# EAGLE board Project_02(Pokey Clicker) (EAGLE 9.6.2)
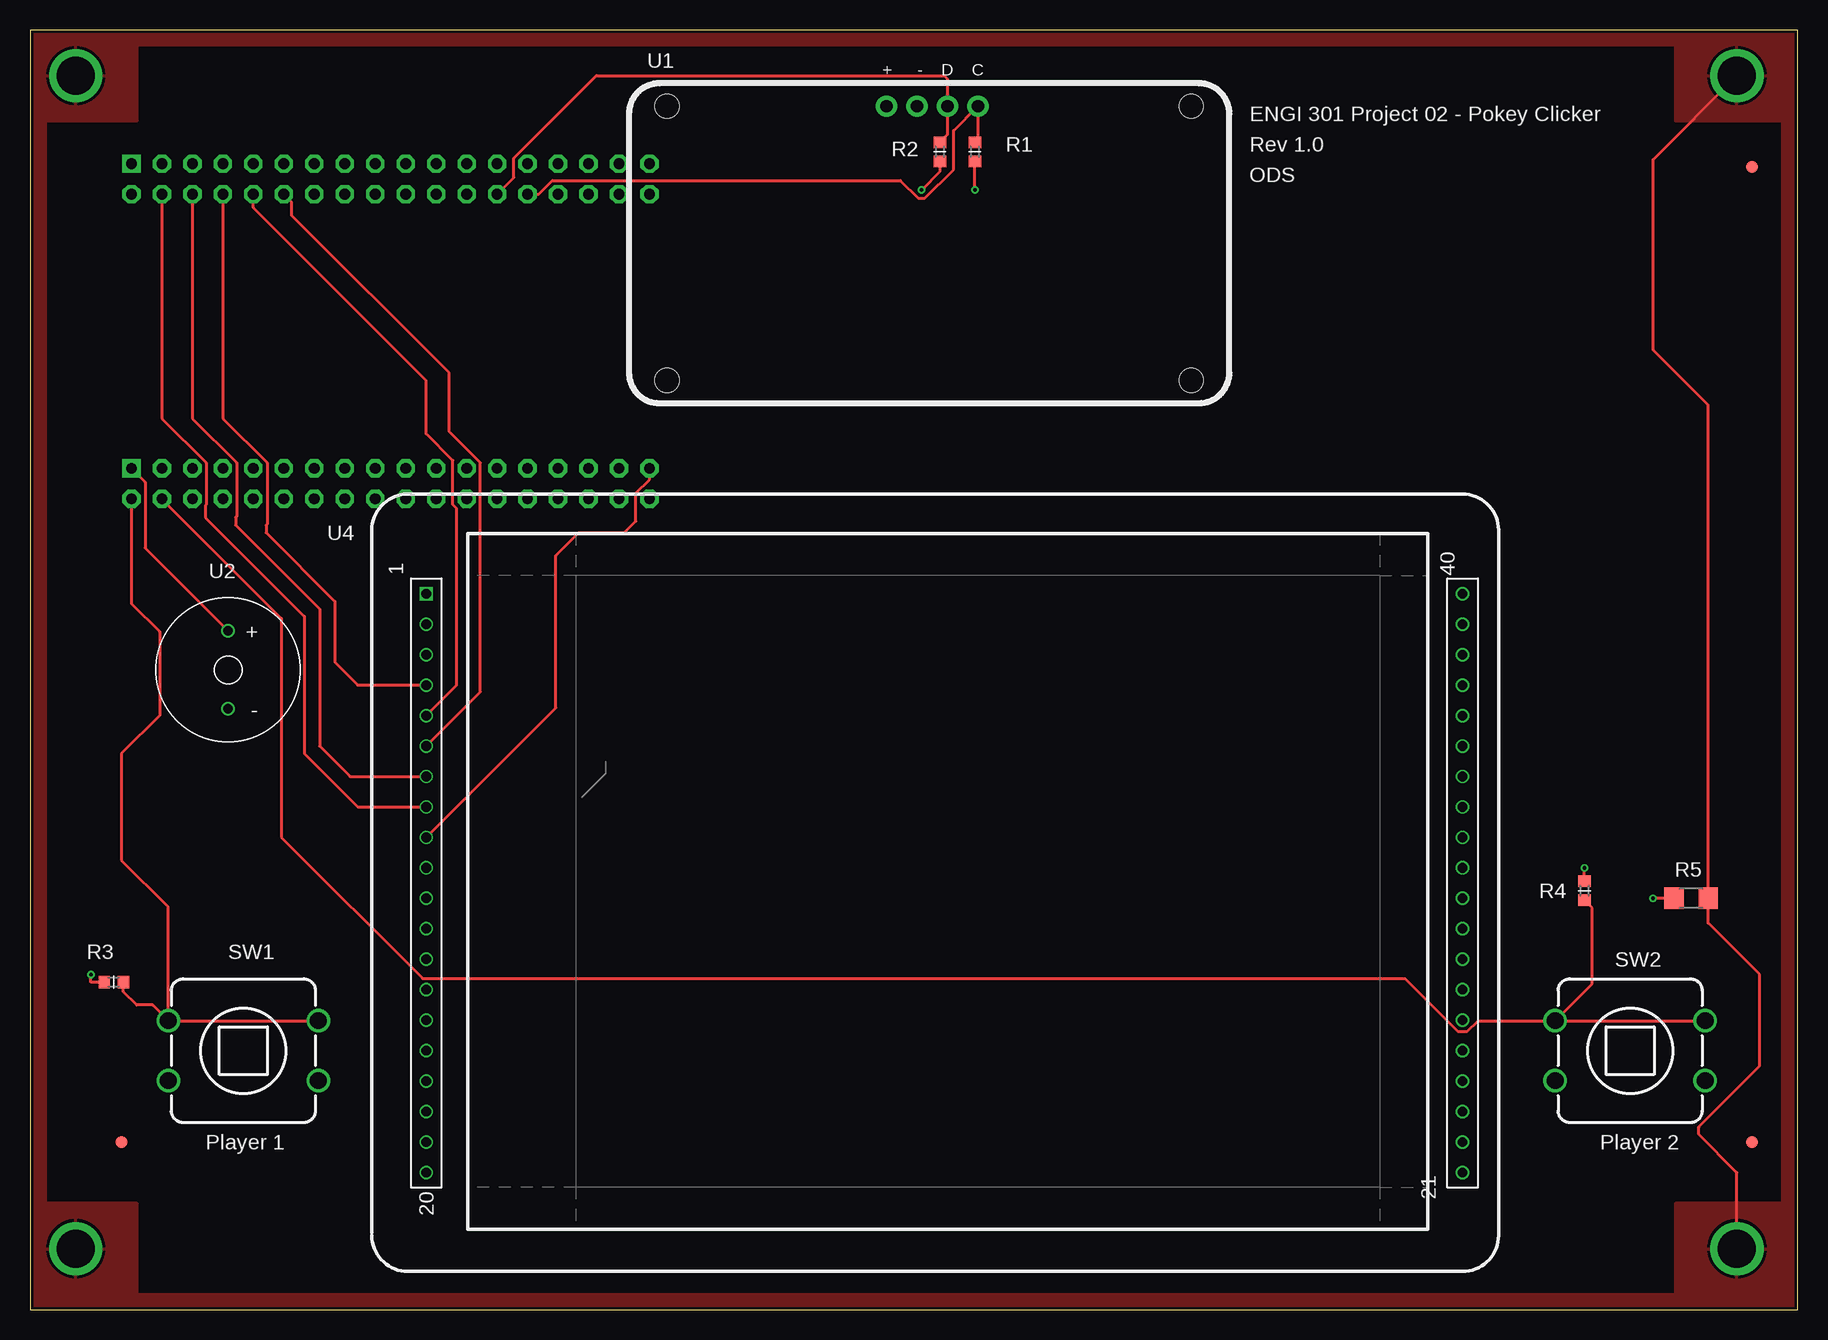
[diagram p0: board, top side]
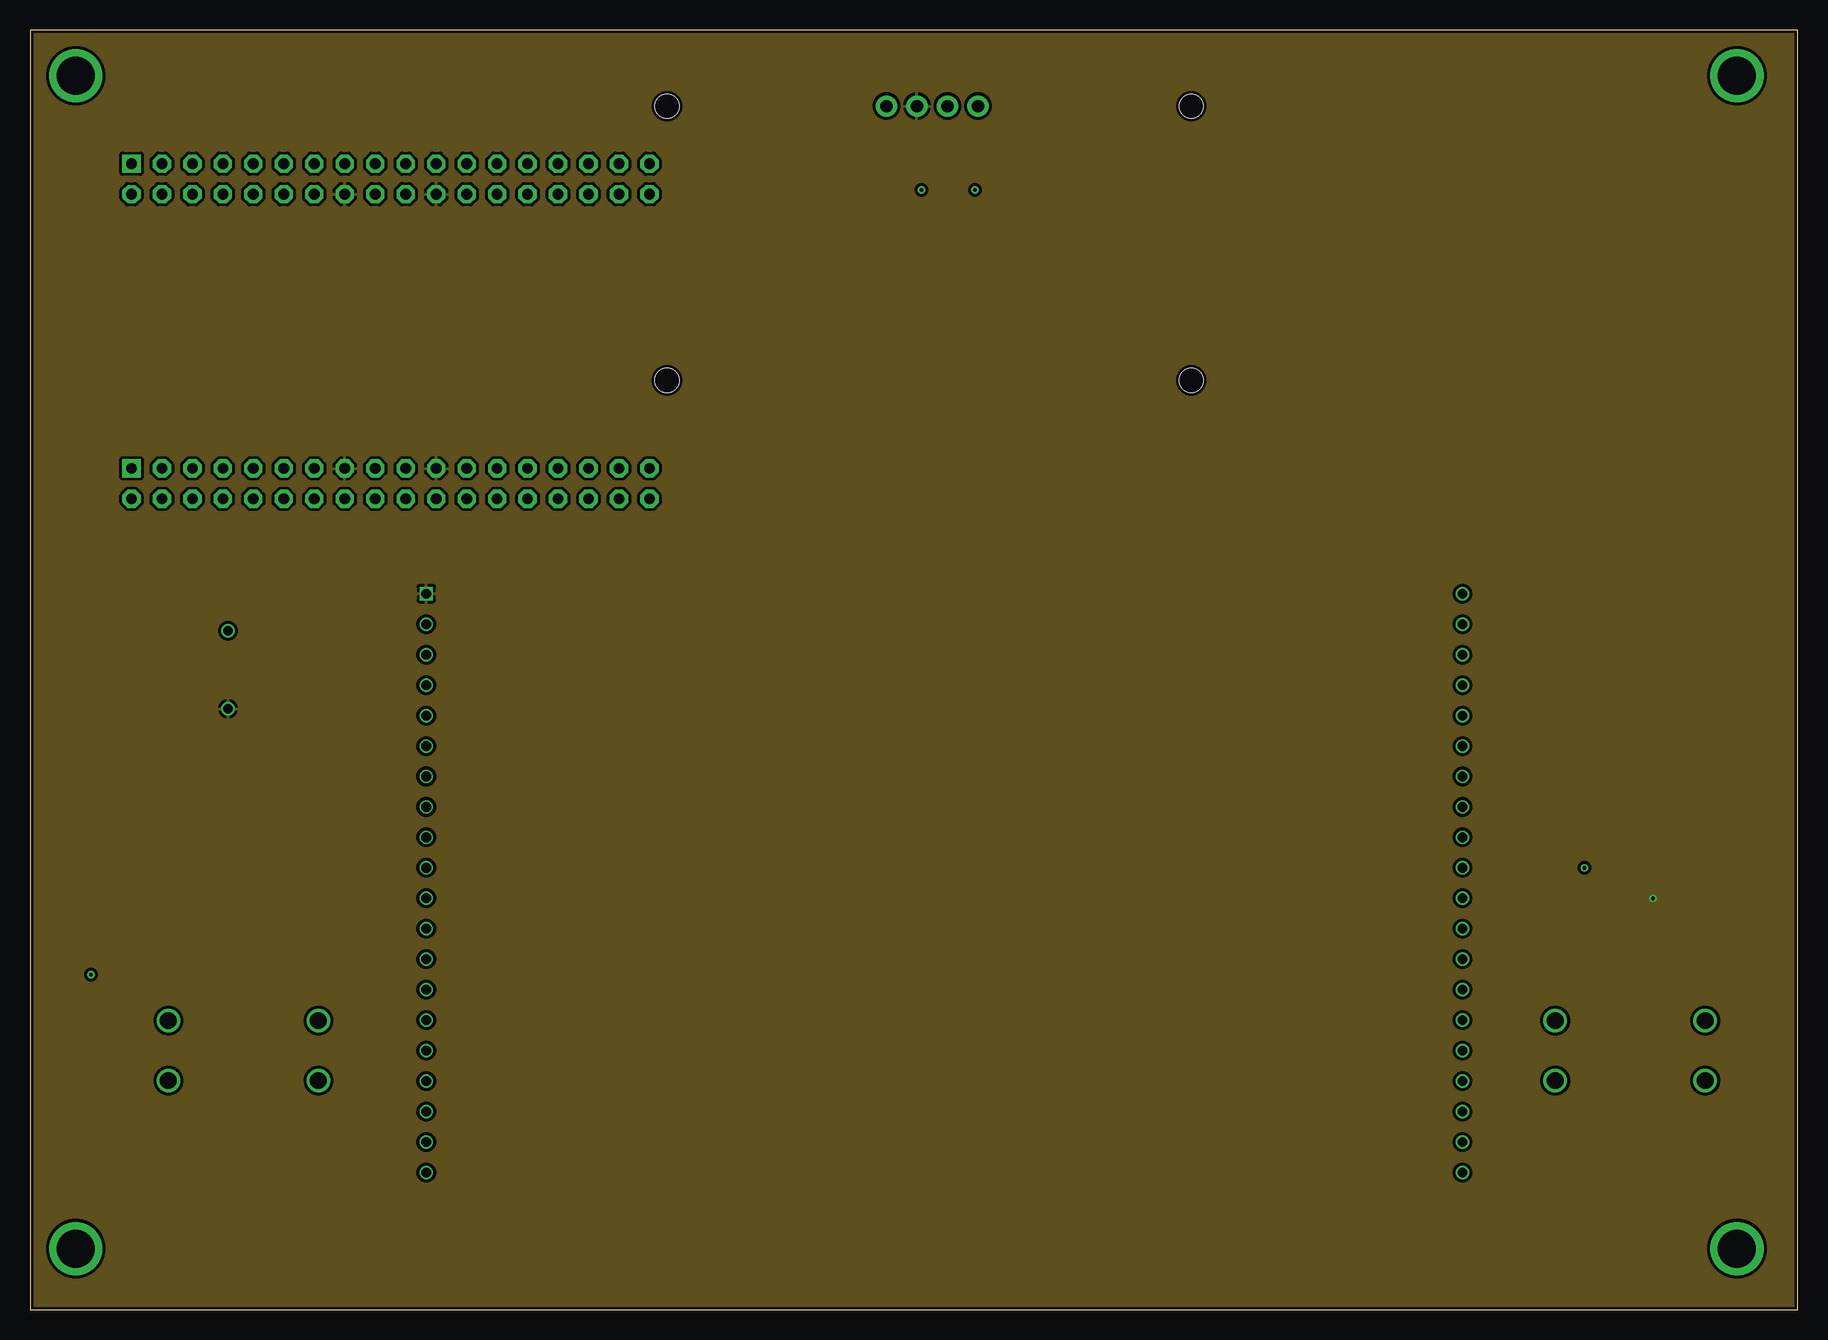
[diagram p1: board, inner layer Route2]
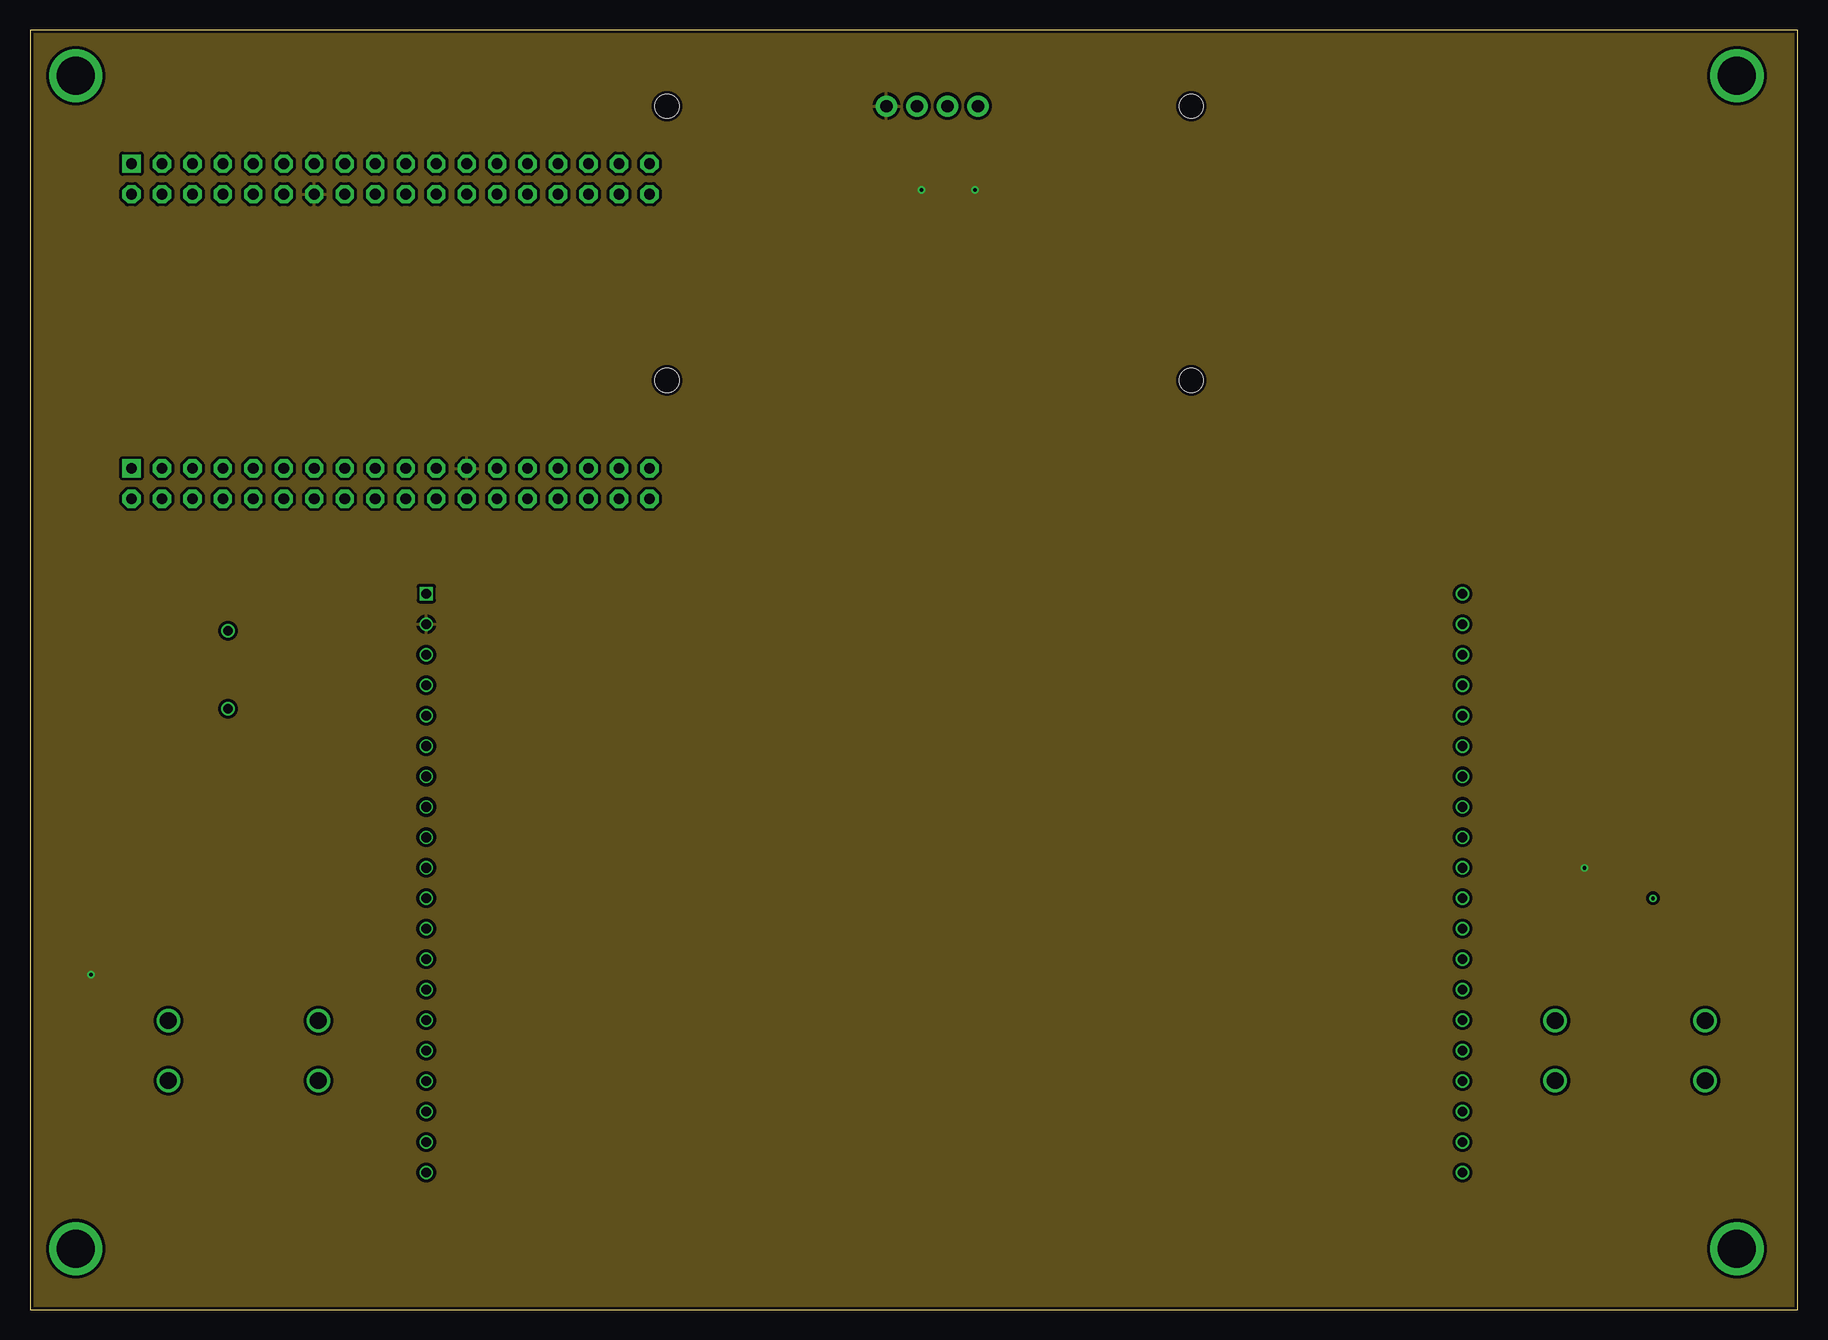
[diagram p2: board, inner layer Route15]
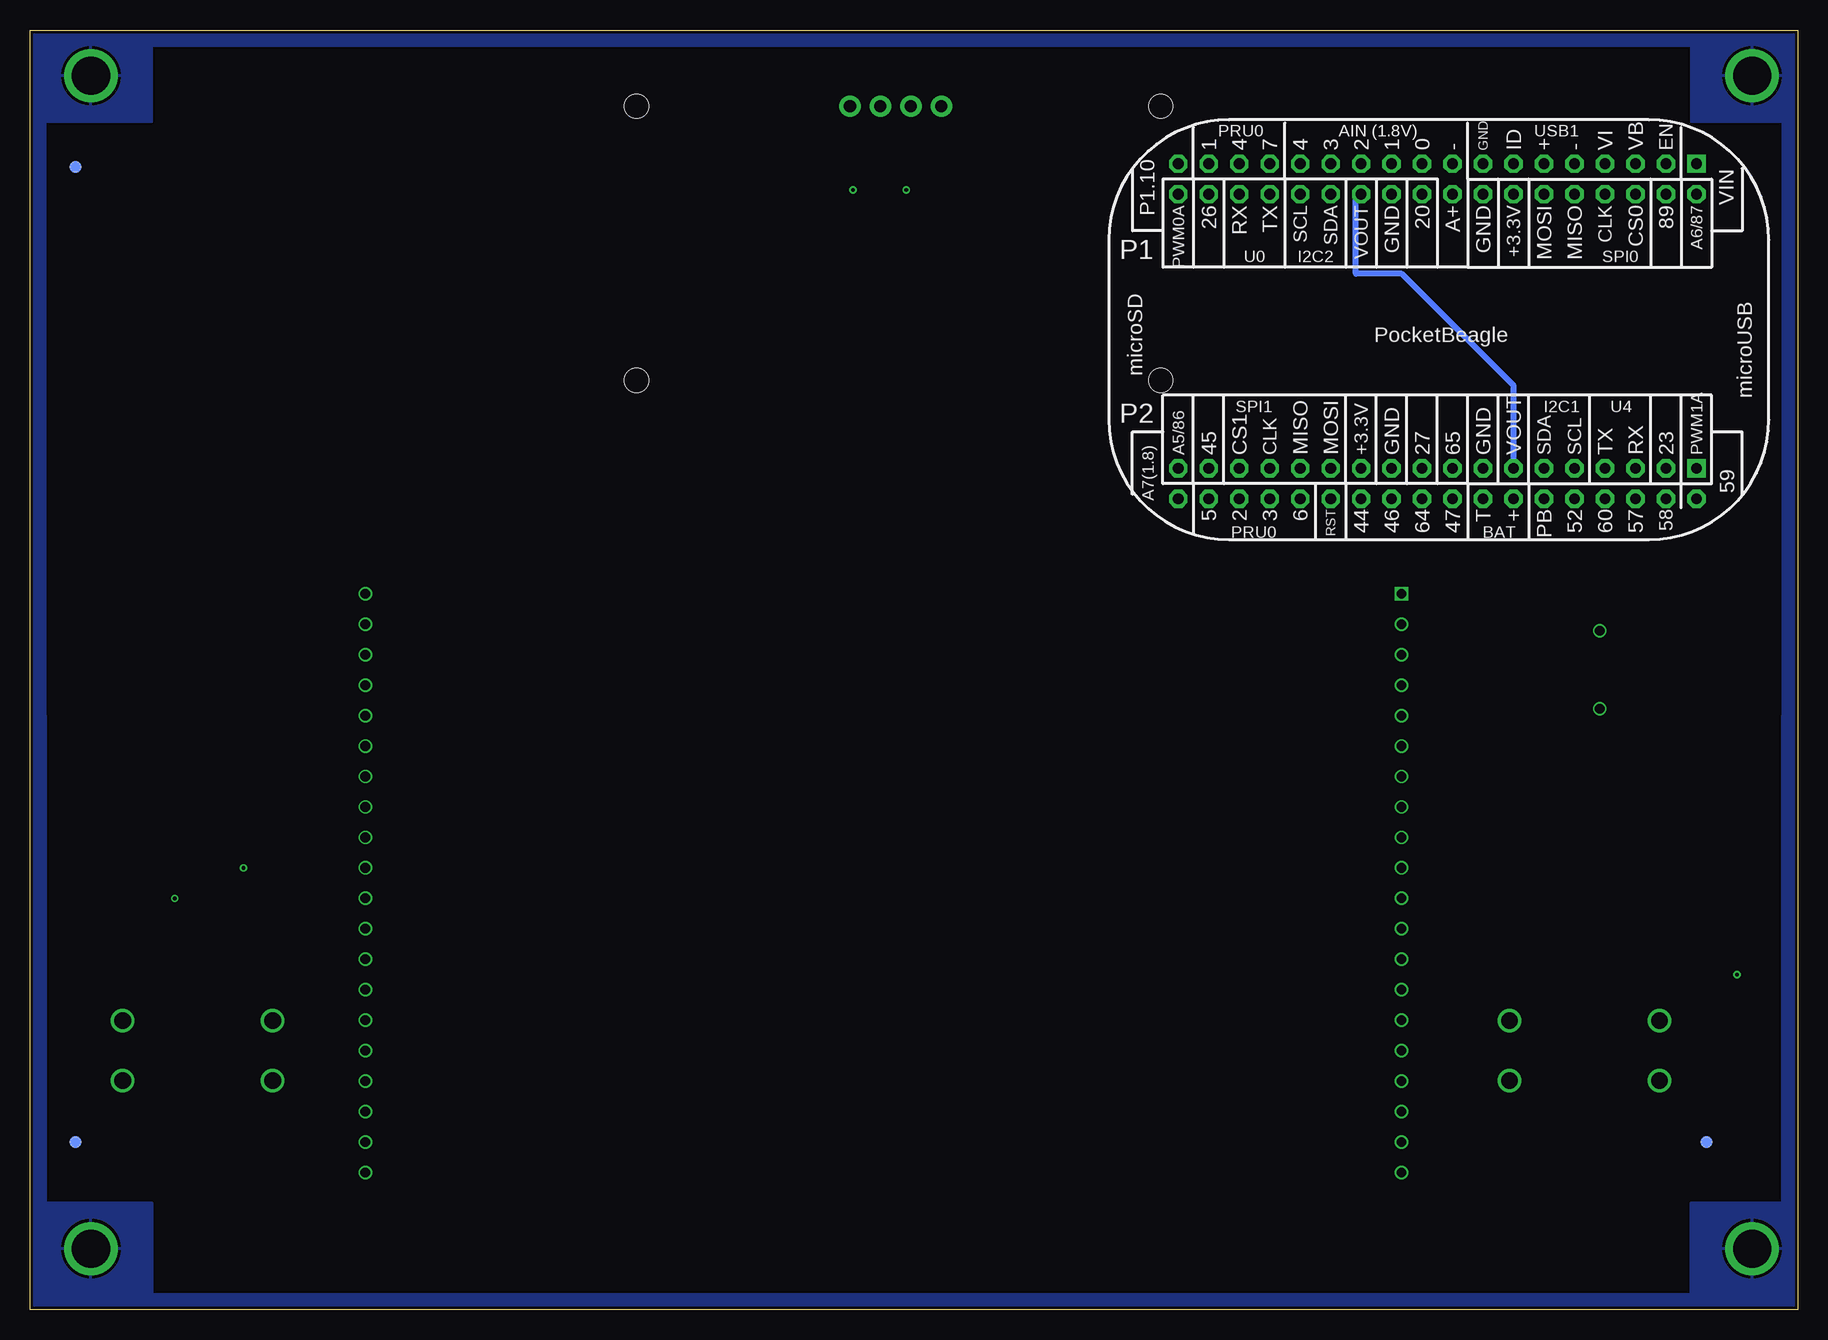
[diagram p3: board, bottom side, seen from below]

Size 147.32 x 106.68 mm. Coordinates in mm from the lower left corner, seen from the top.
Outline: 0,0 147.32,0 147.32,106.68 0,106.68 0,0
Copper layers (1*2*15*16): Top 0.035mm / dielectric 0.23mm / Route2 0.035mm / dielectric 0.93mm / Route15 0.035mm / dielectric 0.23mm / Bottom 0.035mm
Design rules "ENGI301_4lyr": minimum track width 10mil, minimum drill 12mil, track to track 10mil, track to pad 10mil, pad to pad 10mil, via to via 10mil, smd to smd 10mil, copper to edge 10mil, drill to drill 12mil, minimum pad ring 6mil, minimum via ring 6mil, stop-mask expansion 3mil, vias tented up to drill 25mil, thermal gap 10mil

## Footprints (pad centres in the part's own frame; a part is rotated, then mirrored left to right if it is on the bottom)
FIDUCIAL_40MIL = smd 1.016 x 1.016: P$1 0,0
MOUNTING_HOLE = drill 3.175 pad 4.445: P$1 0,0
R0603 = smd 0.95 x 1.031: 1 -0.8,0; 2 0.8,0
R1206 = smd 1.6 x 1.803: 1 -1.422,0; 2 1.422,0
BUTTON_12.5MM = drill 1.4: 1 -6.25,2.5; 2 -6.25,-2.5; 3 6.25,2.5; 4 6.25,-2.5
0.56_HEX_BACKPACK = drill 1.016 pad 1.778: GND -1.016,11.43; SCL 4.064,11.43; SDA 1.524,11.43; VCC -3.556,11.43 | hole 2: -21.844,-11.43; 21.844,-11.43; -21.844,11.43; 21.844,11.43
BUZZER_6.5MM = drill 0.8: + 0,-3.25; - 0,3.25
POCKETBEAGLE = drill 0.889 pad 1.524 square: P1_01 5.91,3.53; P2_01 5.91,28.93 | drill 0.889 pad 1.524 octagon: P1_02 5.91,6.07; P1_03 8.45,3.53; P1_04 8.45,6.07; P1_05 10.99,3.53; P1_06 10.99,6.07; P1_07 13.53,3.53; P1_08 13.53,6.07; P1_09 16.07,3.53; P1_10 16.07,6.07; P1_11 18.61,3.53; P1_12 18.61,6.07; P1_13 21.15,3.53; P1_14 21.15,6.07; P1_15 23.69,3.53; P1_16 23.69,6.07; P1_17 26.23,3.53; P1_18 26.23,6.07; P1_19 28.77,3.53; P1_20 28.77,6.07; P1_21 31.31,3.53; P1_22 31.31,6.07; P1_23 33.85,3.53; P1_24 33.85,6.07; P1_25 36.39,3.53; P1_26 36.39,6.07; P1_27 38.93,3.53; P1_28 38.93,6.07; P1_29 41.47,3.53; P1_30 41.47,6.07; P1_31 44.01,3.53; P1_32 44.01,6.07; P1_33 46.55,3.53; P1_34 46.55,6.07; P1_35 49.09,3.53; P1_36 49.09,6.07; P2_02 5.91,31.47; P2_03 8.45,28.93; P2_04 8.45,31.47; P2_05 10.99,28.93; P2_06 10.99,31.47; P2_07 13.53,28.93; P2_08 13.53,31.47; P2_09 16.07,28.93; P2_10 16.07,31.47; P2_11 18.61,28.93; P2_12 18.61,31.47; P2_13 21.15,28.93; P2_14 21.15,31.47; P2_15 23.69,28.93; P2_16 23.69,31.47; P2_17 26.23,28.93; P2_18 26.23,31.47; P2_19 28.77,28.93; P2_20 28.77,31.47; P2_21 31.31,28.93; P2_22 31.31,31.47; P2_23 33.85,28.93; P2_24 33.85,31.47; P2_25 36.39,28.93; P2_26 36.39,31.47; P2_27 38.93,28.93; P2_28 38.93,31.47; P2_29 41.47,28.93; P2_30 41.47,31.47; P2_31 44.01,28.93; P2_32 44.01,31.47; P2_33 46.55,28.93; P2_34 46.55,31.47; P2_35 49.09,28.93; P2_36 49.09,31.47
TFT_LCD_3P2 = drill 0.8 square: 1 3.81,6.35 | drill 0.8: 2 6.35,6.35; 3 8.89,6.35; 4 11.43,6.35; 5 13.97,6.35; 6 16.51,6.35; 7 19.05,6.35; 8 21.59,6.35; 9 24.13,6.35; 10 26.67,6.35; 11 29.21,6.35; 12 31.75,6.35; 13 34.29,6.35; 14 36.83,6.35; 15 39.37,6.35; 16 41.91,6.35; 17 44.45,6.35; 18 46.99,6.35; 19 49.53,6.35; 20 52.07,6.35; 21 3.81,92.71; 22 6.35,92.71; 23 8.89,92.71; 24 11.43,92.71; 25 13.97,92.71; 26 16.51,92.71; 27 19.05,92.71; 28 21.59,92.71; 29 24.13,92.71; 30 26.67,92.71; 31 29.21,92.71; 32 31.75,92.71; 33 34.29,92.71; 34 36.83,92.71; 35 39.37,92.71; 36 41.91,92.71; 37 44.45,92.71; 38 46.99,92.71; 39 49.53,92.71; 40 52.07,92.71

## Placement (x,y rotation side)
FUD1  FIDUCIAL  [FIDUCIAL_40MIL]  7.62,13.97 0 top
FUD2  FIDUCIAL  [FIDUCIAL_40MIL]  143.51,13.97 0 top
FUD3  FIDUCIAL  [FIDUCIAL_40MIL]  143.51,95.25 0 top
FUD4  FIDUCIAL  [FIDUCIAL_40MIL]  7.62,13.97 0 bottom
FUD5  FIDUCIAL  [FIDUCIAL_40MIL]  143.51,13.97 0 bottom
FUD6  FIDUCIAL  [FIDUCIAL_40MIL]  143.51,95.25 0 bottom
MGT1  MOUNTING_HOLE  [MOUNTING_HOLE]  3.81,5.08 0 top
MGT2  MOUNTING_HOLE  [MOUNTING_HOLE]  3.81,102.87 0 top
MGT3  MOUNTING_HOLE  [MOUNTING_HOLE]  142.24,102.87 0 bottom
MGT4  MOUNTING_HOLE  [MOUNTING_HOLE]  142.24,5.08 0 top
R1  1K  [R0603]  78.74,96.52 270 top
R2  1K  [R0603]  75.82,96.52 270 top
R3  1K  [R0603]  6.99,27.3 180 top
R4  1K  [R0603]  129.54,34.92 90 top
R5  0.1  [R1206]  138.43,34.29 0 top
SW1  PUSH_BUTTON  [BUTTON_12.5MM]  17.78,21.59 0 top
SW2  PUSH_BUTTON  [BUTTON_12.5MM]  133.35,21.59 0 top
U1  0.56_HEX_BACKPACK  [0.56_HEX_BACKPACK]  74.93,88.9 0 top
U2  BUZZER  [BUZZER_6.5MM]  16.51,53.34 180 top
U3  POCKETBEAGLE_V2  [POCKETBEAGLE]  2.54,99.06 180 bottom
U4  TFT_LCD_3P2  [TFT_LCD_3P2]  26.67,63.5 270 top

## Library data of the parts
FUD1-FUD6 MGT1-MGT4 R1-R5 SW1 SW2 U1-U4 = Project_02(Pokey_Clicker)

## Nets
BAT.VIN: U3.P2_14
BUTTON_1: R3.1 SW1.1 SW1.3 U3.P2_02
BUTTON_2: R4.1 SW2.1 SW2.3 U3.P2_04
BUZZER: U2.+ U3.P2_01
CGND: MGT1.P$1 MGT2.P$1 MGT3.P$1 MGT4.P$1 R5.2
CLK: U3.P1_08 U4.4
CS: U3.P1_06 U4.7
D/C: U3.P1_04 U4.8
GND: R5.1 U1.GND U2.- U3.P1_16 U3.P1_22 U3.P2_15 U3.P2_21 U4.1
I2C1_SCL: R1.1 U1.SCL U3.P1_28
I2C1_SDA: R2.1 U1.SDA U3.P1_26
MISO: U3.P1_10 U4.5
MOSI: U3.P1_12 U4.6
RST: U3.P2_35 U4.9
VDD_3P3V: R1.2 R2.2 R3.2 R4.2 U1.VCC U3.P1_14 U3.P2_23 U4.2
VIN: U3.P1_01
VOUT: U3.P1_24 U3.P2_13

## Tracks (layer width: path | path; a pad name or v marks a point on that pad's centre or on a via)
BUTTON_1
  Top 0.254: 11.46,24.16 SW1.1 SW1.3 | 11.46,24.16 10.22,25.4 8.89,25.4 7.79,26.5 R3.1 | U3.P2_02 8.45,58.86 10.79,56.52 10.79,49.53 7.62,46.35 7.62,37.47 11.46,33.62 11.46,24.16
BUTTON_2
  Top 0.254: SW2.1 SW2.3 | SW2.1 130.18,27.16 130.18,33.49 R4.1 | U3.P2_04 20.95,57.62 20.95,39.37 32.71,27.61 114.57,27.61 118.99,23.19 119.77,23.19 120.67,24.09 SW2.1
BUZZER
  Top 0.254: U3.P2_01 9.59,68.99 9.59,63.51 U2.+
CGND
  Top 0.254: MGT4.P$1 142.24,11.43 139.06,14.61 139.06,15.24 144.15,20.32 144.15,27.94 139.85,32.23 R5.2 139.85,75.41 135.25,80.01 135.25,95.89 MGT3.P$1
  pour Top: -1.27,49.53 -1.27,107.95 148.59,107.95 148.59,49.53 146.05,49.53 146.05,99.06 137.16,99.06 137.16,105.41 8.89,105.41 8.89,99.06 1.27,99.06 1.27,49.53
  pour Top: -1.27,49.53 1.27,49.53 1.27,8.89 7.62,8.89 8.89,8.89 8.89,1.27 137.16,1.27 137.16,8.89 146.05,8.89 146.05,49.53 148.59,49.53 148.59,-1.27 -1.27,-1.27
  pour Bottom: -1.27,49.53 -1.27,107.95 148.59,107.95 148.59,49.53 146.05,49.53 146.05,99.06 137.16,99.06 137.16,105.41 8.89,105.41 8.89,99.06 1.27,99.06 1.27,49.53
  pour Bottom: -1.27,49.53 -1.27,-1.27 148.59,-1.27 148.59,49.53 146.05,49.53 146.05,8.89 137.16,8.89 137.16,1.27 8.89,1.27 8.89,8.89 1.27,8.89 1.27,49.53
CLK
  Top 0.254: U3.P1_08 16.07,74.29 19.75,70.6 19.75,65.47 19.68,65.41 19.68,64.77 25.4,59.05 25.4,53.98 27.3,52.07 U4.4
CS
  Top 0.254: U3.P1_06 13.53,74.29 17.21,70.6 17.21,66.11 17.14,66.04 17.14,65.41 24.13,58.42 24.13,46.99 26.67,44.45 U4.7
D/C
  Top 0.254: U3.P1_04 10.99,74.29 14.67,70.6 14.67,67.12 14.61,67.05 14.61,66.04 22.86,57.78 22.86,46.35 27.3,41.91 U4.8
GND  (via drill 0.3 pad 0.61)
  Top 0.254: R5.1 v135.25,34.29
  pour Route2: -2.54,48.26 -2.54,109.22 149.86,109.22 149.86,-2.54 -2.54,-2.54
I2C1_SCL
  Top 0.254: R1.1 78.99,97.57 U1.SCL 76.96,98.3 76.96,95.04 74.58,92.66 74.01,92.66 72.54,94.13 43.54,94.13 42.39,92.99 U3.P1_28
I2C1_SDA
  Top 0.254: R2.1 76.45,97.95 U1.SDA 76.45,102.62 76.2,102.87 47.19,102.87 40.33,96 40.33,94.39 U3.P1_26
MISO
  Top 0.254: U4.5 35.56,52.07 35.56,66.8 35.25,67.12 35.25,70.8 33.02,73.03 33.02,77.47 18.61,91.88 U3.P1_10
MOSI
  Top 0.254: U4.6 37.53,51.5 37.53,70.6 34.92,73.21 34.92,78.11 21.79,91.25 21.79,92.36 U3.P1_12
RST
  Top 0.254: U4.9 43.81,50.16 43.81,62.87 45.72,64.77 49.53,64.77 50.49,65.73 50.49,68.06 51.63,69.21 U3.P2_35
VDD_3P3V  (via drill 0.3 pad 0.61)
  Top 0.254: R4.2 v129.54,36.83 | R3.2 5.08,27.3 v5.08,27.94 | R2.2 75.82,94.87 v74.3,93.34 | v78.74,93.34 R1.2
  pour Route15: -5.08,-2.54 -5.08,111.76 152.4,111.76 152.4,-5.08 -5.08,-5.08
VOUT
  Bottom 0.508: U3.P2_13 23.69,77.03 33.02,86.36 36.83,86.36 36.83,92.55 U3.P1_24

## Text on the board
tPlace: ENGI 301 Project 02 - Pokey Clicker | Rev 1.0 | ODS | Player 1 | Player 2